# EAGLE board Grove - Buzzer v1.1b (EAGLE 7.2.0)
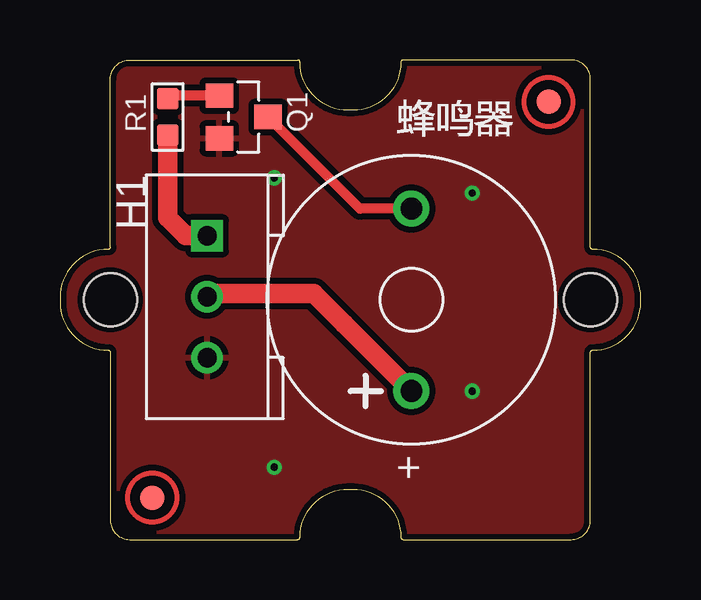
[diagram p0: board, top side]
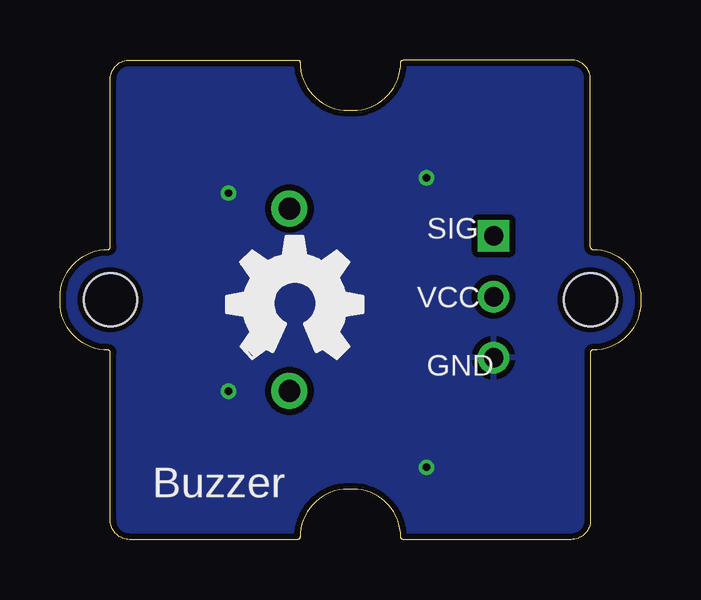
[diagram p1: board, bottom side, seen from below]

Size 24.2 x 20 mm. Coordinates in mm from the lower left corner, seen from the top.
Copper layers (1*16): Top 0.035mm / dielectric 1.5mm / Bottom 0.035mm
Design rules "SeeedStudio_rule_no_angle_090911": minimum track width 6mil, minimum drill 12mil, track to track 6mil, track to pad 6mil, pad to pad 6mil, via to via 6mil, smd to smd 0mil, copper to edge 10mil, drill to drill 10mil, minimum pad ring 10mil, minimum via ring 6mil, stop-mask expansion 2mil, vias tented up to drill 25mil, thermal gap 10mil

## Footprints (pad centres in the part's own frame; a part is rotated, then mirrored left to right if it is on the bottom)
2P-7.6-D12X6.5H = drill 0.9 pad 1.5: + -3.8,0; - 3.8,0
HEAD_LOCK = drill 0.8 square: 1 0,0 | drill 0.8: 2 2.54,0; 3 5.08,0
ROUND-MARK-1.0 = smd 1.016 x 1.016: P$1 0,0
SOT23 = smd 1.016 x 1.143: 1 -0.889,-1.016; 2 0.889,-1.016; 3 0,1.016
R0603 = smd 0.889 x 0.889: 1 -0.762,0; 2 0.762,0
1U-DIM-W/-DRILL = hole 2.2: 0,-10; 0,10

## Placement (x,y rotation side)
BUZ1  [2P-7.6-D12X6.5H]  14.64,10 90 top
H1  HEAD_LOCK  [HEAD_LOCK]  6.13,12.67 270 top
P1  [ROUND-MARK-1.0]  20.36,18.26 0 top
P2  [ROUND-MARK-1.0]  3.84,1.74 0 top
Q1  S9013  [SOT23]  7.65,17.62 270 top
R1  1K  [R0603]  4.48,17.62 90 top
U$1  [1U-DIM-W/-DRILL]  12.1,10 90 top
U$2  [OSHW_FILLX200_NOTEXT]  17.26,7.56 0 bottom

## Library data of the parts
BUZ1 Q1 R1 = Discrete
H1 = HEAD_LOCK
P1 P2 = Discrete; PARTNO: DNP
U$1 = moudle
U$2 = Logo

## Nets
D1: H1.1 R1.1
DRI: BUZ1.- Q1.3
GND: H1.3 Q1.2
N$2: Q1.1 R1.2
VCC: BUZ1.+ H1.2

## Tracks (layer width: path | path; a pad name or v marks a point on that pad's centre or on a via)
D1
  Top 0.813: H1.1 5.24,12.67 4.48,13.43 R1.1
DRI
  Top 0.406: BUZ1.- 12.49,13.8 Q1.3
GND  (via drill 0.3 pad 0.64)
  other vias: 17.18,14.45 17.18,6.19 8.93,15.08 8.93,3.01
  pour Top (isolate 0.254): -0.6,-0.16 24.8,-0.16 24.8,20.16 -0.6,20.16
  pour Bottom (isolate 0.254): -0.6,-0.16 24.8,-0.16 24.8,20.16 -0.6,20.16 -0.6,-0.03
N$2
  Top 0.406: Q1.1 4.48,18.51 R1.2
VCC
  Top 0.813: 11.84,9 BUZ1.+ 10.58,10.25 6.26,10.25 H1.2

## Text on the board
tPlace: +
bPlace: SIG | VCC | GND | Buzzer